# EAGLE board Kickerboard (EAGLE 9.6.2)
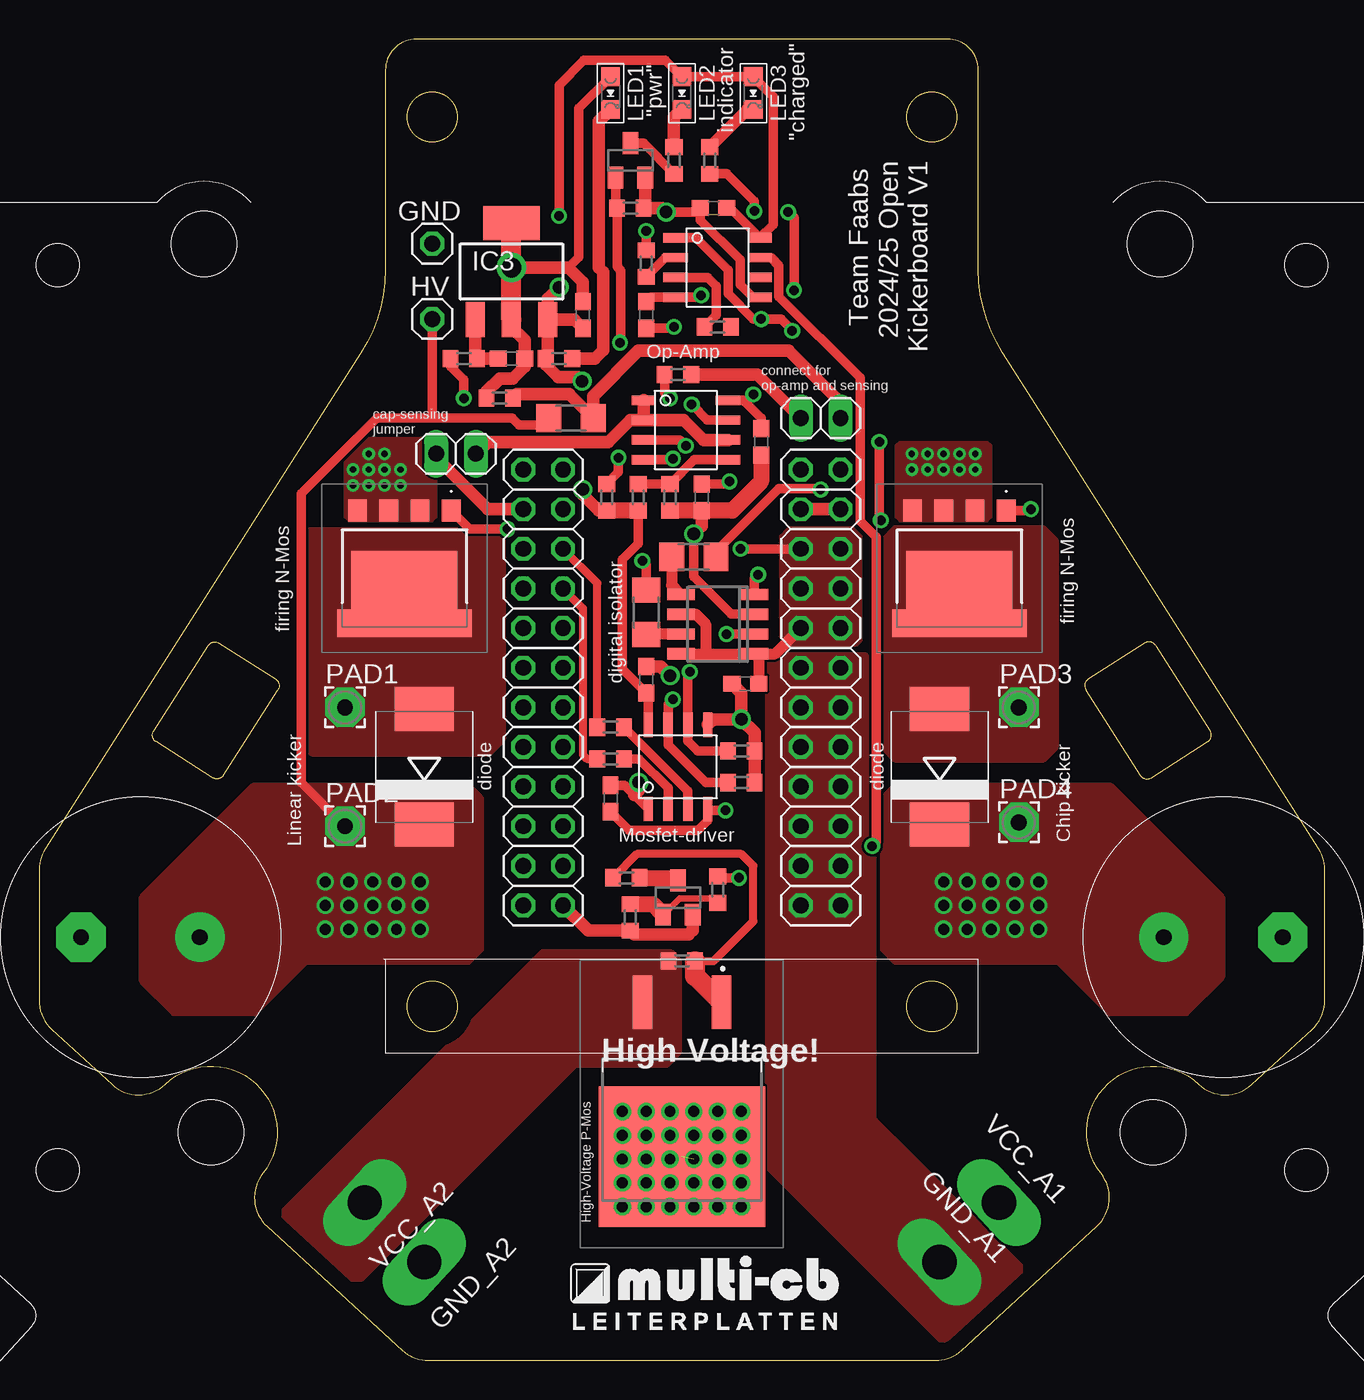
[diagram p0: board, top side]
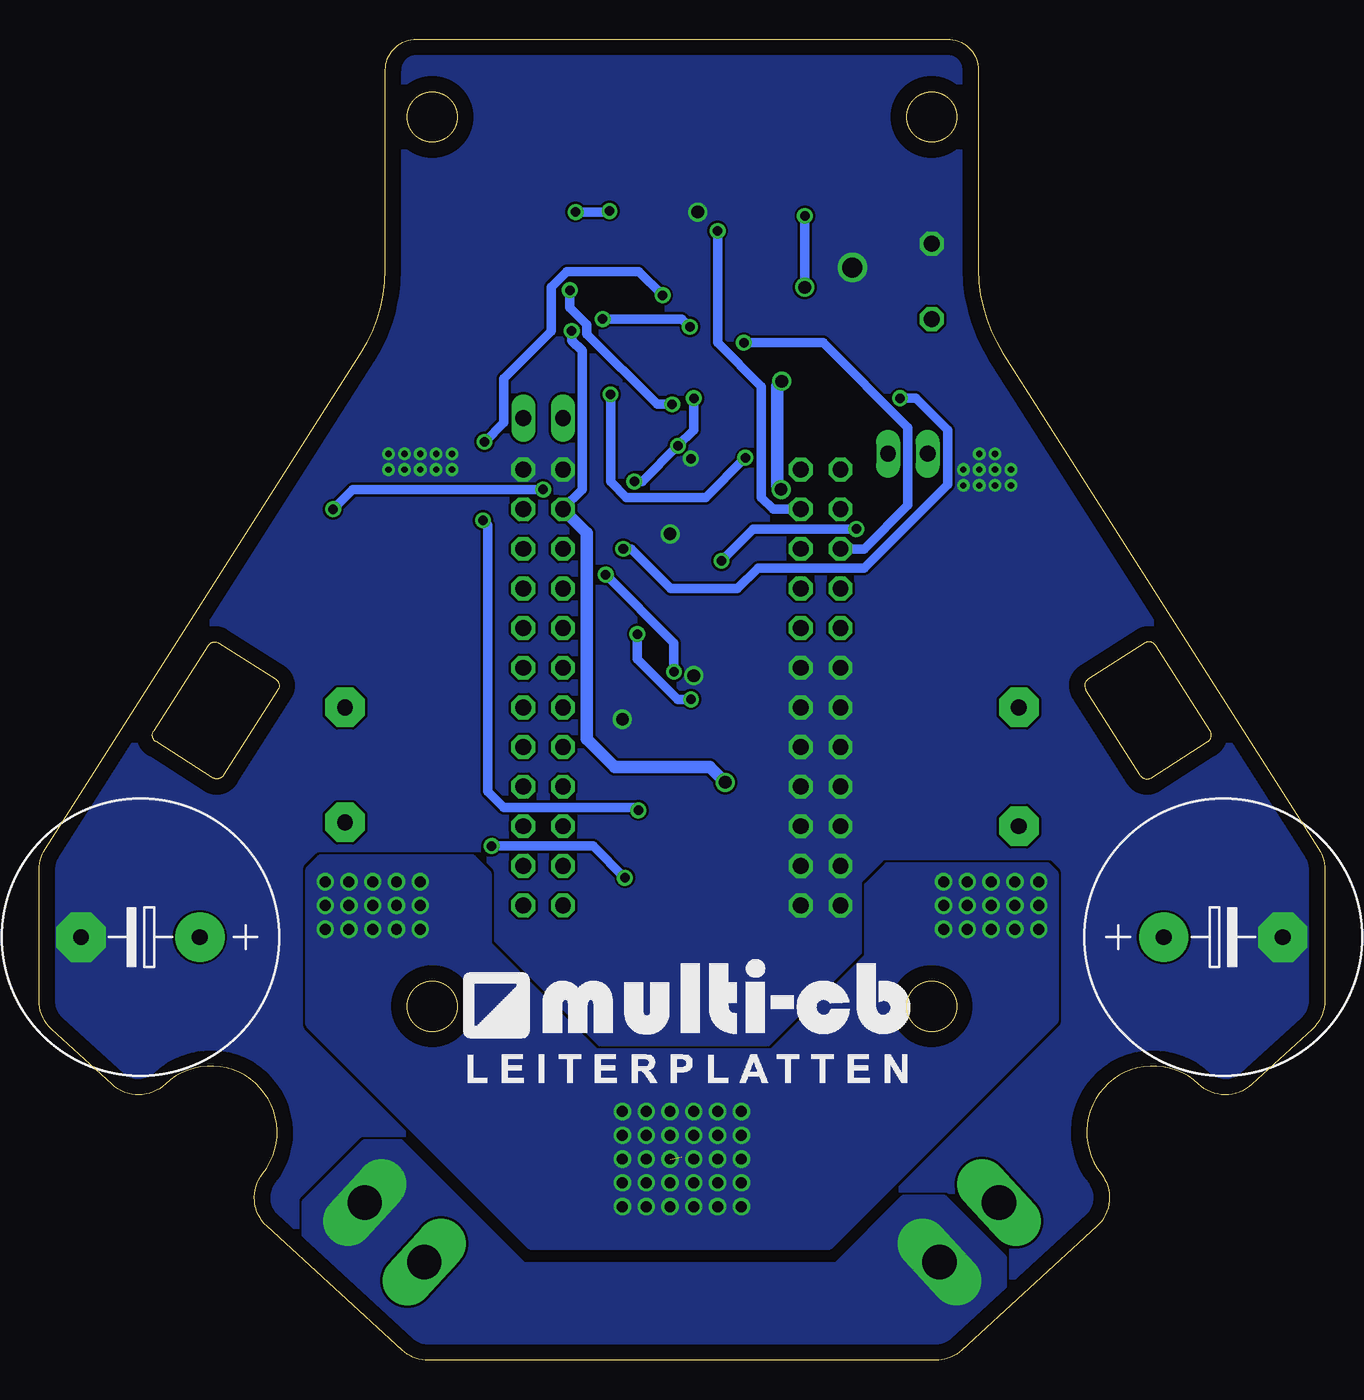
[diagram p1: board, bottom side, seen from below]

Size 82.39 x 84.7 mm. Coordinates in mm from the lower left corner, seen from the top.
Outline: 74.89,39.66 arc90 75.04,40.35
Outline: 71.55,45.84 arc90 70.86,45.99
Outline: 67.23,43.68 arc90 67.08,42.99
Outline: 70.57,37.51 arc90 71.26,37.35
Outline: 71.55,45.84 arc90 70.86,45.99
Outline: 70.86,45.99 67.23,43.68
Outline: 67.23,43.68 arc90 67.08,42.99
Outline: 67.08,42.99 70.57,37.51
Outline: 70.57,37.51 arc90 71.26,37.35
Outline: 71.26,37.35 74.89,39.66
Outline: 74.89,39.66 arc90 75.04,40.35
Outline: 71.55,45.84 75.04,40.35
Outline: 4.68,17.69 arc86 8.09,17.71 arc-172 14.34,11.98 arc86 14.61,8.59 23.27,0.66 arc42 24.96,0 57.43,0 arc42 59.12,0.66 67.77,8.59 arc86 68.05,11.98 arc-172 74.3,17.71 arc86 77.7,17.69 81.58,21.24 arc48 82.39,23.08 82.39,31.46 arc32 82,32.8 61.76,64.56 arc-32 60.19,69.94 60.19,82.7 arc90 58.19,84.7 24.19,84.7 arc90 22.19,82.7 22.19,69.94 arc-32 20.63,64.56 0.39,32.8 arc32 0,31.46 0,23.08 arc48 0.81,21.24 4.68,17.69
Outline: 10.84,45.84 arc-90 11.53,45.99 15.16,43.68 arc-90 15.31,42.99 11.82,37.51 arc-90 11.13,37.35 7.5,39.66 arc-90 7.35,40.35 10.84,45.84
Outline: circle at 57.19,79.7 radius 1.6
Outline: circle at 57.19,22.7 radius 1.6
Outline: circle at 25.19,22.7 radius 1.6
Outline: circle at 25.19,79.7 radius 1.6
Copper layers (1*16): Top 0.035mm / dielectric 1.5mm / Bottom 0.035mm
Design rules "default": minimum track width 6mil, minimum drill 0.35mm, track to track 6mil, track to pad 6mil, pad to pad 6mil, via to via 6mil, smd to smd 6mil, copper to edge 40mil, drill to drill 6mil, minimum pad ring 10mil, minimum via ring 8mil, stop-mask expansion 4mil, vias tented up to drill 0mil, thermal gap 10mil
Net classes: 1 HV: width 0.203 mm, drill 0.305 mm, clearance 0.762 mm

## Footprints (pad centres in the part's own frame; a part is rotated, then mirrored left to right if it is on the bottom)
OPEN24_RCL_E7,5-18 = drill 1.016 pad 3.15: + -3.81,0 | drill 1.016 pad 3.15 octagon: - 3.81,0
C0603 = smd 1.1 x 1: 1 -0.85,0; 2 0.85,0
2X12 = drill 1.016 octagon: 1 -13.97,-1.27; 2 -13.97,1.27; 3 -11.43,-1.27; 4 -11.43,1.27; 5 -8.89,-1.27; 6 -8.89,1.27; 7 -6.35,-1.27; 8 -6.35,1.27; 9 -3.81,-1.27; 10 -3.81,1.27; 11 -1.27,-1.27; 12 -1.27,1.27; 13 1.27,-1.27; 14 1.27,1.27; 15 3.81,-1.27; 16 3.81,1.27; 17 6.35,-1.27; 18 6.35,1.27; 19 8.89,-1.27; 20 8.89,1.27; 21 11.43,-1.27; 22 11.43,1.27; 23 13.97,-1.27; 24 13.97,1.27
OPEN24_DIODE_SMC:1 = smd 2.8 x 3.8: A 3.7,0; C -3.7,0
SQM120P10_10M1LGE3_SQM120P10_10M1LGE3 = smd 10.668 x 9.017: DRAIN 0,3.4 | smd 1.257 x 3.429: GATE -2.525,-6.506; SOURCE 2.525,-6.506
1X02 = drill 1.016 long: 1 -1.27,0; 2 1.27,0
1X01 = drill 1.016 octagon: 1 0,0
MOTOR-DRIVER_PPAD = drill 2.2 long: P$1 0,0
TIGERS_SOIC8N = smd 1.55 x 0.6: 1 -2.7,1.905; 2 -2.7,0.635; 3 -2.7,-0.635; 4 -2.7,-1.905; 5 2.7,-1.905; 6 2.7,-0.635; 7 2.7,0.635; 8 2.7,1.905
TIGERS_SOT223 = smd 1.219 x 2.235: 1 -2.311,-3.099; 2 0,-3.099; 3 2.311,-3.099 | smd 3.6 x 2.2: 4 0,3.099
R0603 = smd 1 x 1.1: 1 -0.85,0; 2 0.85,0
POWER_DISTRIBUTION_CHIPLED_0805 = smd 1.2 x 1.2: A 0,-1.05; C 0,1.05
IR_SO08 = smd 0.72 x 1.78: 1 -1.905,-2.35; 2 -0.635,-2.35; 3 0.635,-2.35; 4 1.905,-2.35; 5 1.905,2.35; 6 0.635,2.35; 7 -0.635,2.35; 8 -1.905,2.35
TIGERS_2,54/1,0 = drill 1.016 pad 2.54 octagon: 1 0,0
PSMNR55-40SSHJ_BUK7S1R540HJ = smd 1.2 x 1.4: 1 -3,-3.725; 2 -1,-3.725; 3 1,-3.725; 4 3,-3.725 | smd 8.6 x 1.76: 5 0,3.495 | smd 6.8 x 3.74: 6 0,0.745
TRANSISTOR-SMALL-SIGNAL_SOT23 = smd 1 x 1.4: 1 -0.95,-1.1; 2 0.95,-1.1; 3 0,1.1
R1206 = smd 1.6 x 1.803: 1 -1.422,0; 2 1.422,0

## Placement (x,y rotation side)
C1  63V, 2200uF  [OPEN24_RCL_E7,5-18]  6.5,27.14 0 bottom
C2  63V, 2200uF  [OPEN24_RCL_E7,5-18]  75.89,27.14 180 bottom
C3  100n  [C0603]  42.46,55.33 270 top
C4  100n  [C0603]  45.26,43.39 180 top
C5  100n  [C0603]  43.23,73.87 180 top
C6  100n  [C0603]  38.91,67.01 90 top
C9  100n  [C0603]  36.62,36.02 270 top
C10  100n  [C0603]  38.91,43.64 90 top
C22  100n  [C0603]  46.27,58.88 270 top
C24  10u  [C0603]  30.27,64.22 0 top
C25  10u  [C0603]  34.84,67.01 90 top
CONNECTOR_MAINPCB1  [2X12]  50.08,43.13 90 top
CONNECTOR_MAINPCB2  [2X12]  32.3,43.13 90 top
D1  S10MCH  [OPEN24_DIODE_SMC:1]  24.68,38.05 90 top
D2  S10MCH  [OPEN24_DIODE_SMC:1]  57.7,38.05 90 top
EN_HV-PMOS  SQM120P10  [SQM120P10_10M1LGE3_SQM120P10_10M1LGE3]  41.19,16.46 180 top
EN_HVSENS  [1X02]  50.08,60.41 180 top
GND  [1X01]  25.19,71.58 0 top
GND_A1  MOTOR-DRIVER_PPAD  [MOTOR-DRIVER_PPAD]  57.7,6.3 42.5 top
GND_A2  MOTOR-DRIVER_PPAD  [MOTOR-DRIVER_PPAD]  24.68,6.3 317.5 top
HV  [1X01]  25.19,66.76 0 top
HV_SENSED_JP  [1X02]  26.72,58.12 180 top
IC1  [TIGERS_SOIC8N]  43.48,70.06 0 top
IC2  [TIGERS_SOIC8N]  40.94,38.05 90 top
IC3  TIGERS_MCP1790  [TIGERS_SOT223]  30.27,69.8 0 top
IC4  MCP6002  [TIGERS_SOIC8N]  41.45,59.64 0 top
L1  120R, Ferride Bead!!!  [R0603]  27.22,64.22 180 top
L2  120R, Ferride Bead!!!  [R0603]  36.37,55.33 270 top
LED1  [POWER_DISTRIBUTION_CHIPLED_0805]  36.62,81.23 180 top
LED2  [POWER_DISTRIBUTION_CHIPLED_0805]  41.19,81.23 180 top
LED3  [POWER_DISTRIBUTION_CHIPLED_0805]  45.77,81.23 180 top
MOSFET-DRIVER  UCC27624QDRQ1  [IR_SO08]  43.48,47.2 90 top
PAD1  LINEAR  [TIGERS_2,54/1,0]  19.6,41.86 0 top
PAD2  LINEAR  [TIGERS_2,54/1,0]  19.6,34.24 0 top
PAD3  CHIP  [TIGERS_2,54/1,0]  62.78,41.86 0 top
PAD4  CHIP  [TIGERS_2,54/1,0]  62.78,34.5 0 top
Q1  PSMN3R3  [PSMNR55-40SSHJ_BUK7S1R540HJ]  23.41,50.75 180 top
Q2  PSMN3R3  [PSMNR55-40SSHJ_BUK7S1R540HJ]  58.97,50.75 180 top
Q3  MMFTN123  [TRANSISTOR-SMALL-SIGNAL_SOT23]  40.94,29.67 0 top
Q5  bss138  [TRANSISTOR-SMALL-SIGNAL_SOT23]  37.89,76.92 0 top
R1  10R  [R1206]  38.91,47.96 90 top
R2  10R  [R1206]  41.96,51.52 0 top
R3  1k  [R0603]  45,39.07 180 top
R4  1k  [R0603]  45,37.04 180 top
R5  1k  [R0603]  33.32,64.22 180 top
R6  100R  [R0603]  36.62,38.56 180 top
R7  100R  [R0603]  36.62,40.59 180 top
R8  50k  [R0603]  37.64,30.94 180 top
R9  10k  [R0603]  41.19,25.61 180 top
R10  10k  [R0603]  37.89,28.4 90 top
R11  100R  [R0603]  43.48,30.18 270 top
R12  1k  [R0603]  40.69,76.92 90 top
R13  5k  [R0603]  37.89,73.87 0 top
R14  1k  [R0603]  42.97,76.92 90 top
R15  100R  [R0603]  38.91,70.31 90 top
R16  1k  [R0603]  40.94,63.2 0 top
R17  100k  [R0603]  38.4,55.33 90 top
R18  100k  [R0603]  40.43,55.33 270 top
R19  10M 0.5%  [R1206]  34.08,60.41 180 top
R20  549k  [R0603]  29.51,61.68 0 top
R21  100R  [R0603]  43.48,66.25 0 top
U$1  MULTICB_LOGOSTANDART  [SMALL_STANDARTLOGO_28MM]  56.43,16.97 0 bottom
U$2  MULTICB_LOGOMINI  [MINI_LOGO_17MM]  33.32,1.48 0 top
VCC_A1  MOTOR-DRIVER_PPAD  [MOTOR-DRIVER_PPAD]  61.51,10.11 42.5 top
VCC_A2  MOTOR-DRIVER_PPAD  [MOTOR-DRIVER_PPAD]  20.87,10.11 317.5 top

## Library data of the parts
C1 C2 = Schussboard; SPICEPREFIX: C
C3-C6 C9 C10 C22 C24 C25 = rcl; SPICEPREFIX: C
CONNECTOR_MAINPCB1 CONNECTOR_MAINPCB2 EN_HVSENS GND HV HV_SENSED_JP = pinhead
D1 D2 IC1-IC3 = Schussboard
EN_HV-PMOS = Schussboard; DESCRIPTION: Trans MOSFET P-CH 100V 120A Automotive 3-Pin(2+Tab) D2PAK; HEIGHT: 0.19mm; MANUFACTURER_NAME: Vishay; MANUFACTURER_PART_NUMBER: SQM120P10_10M1LGE3; MOUSER_PART_NUMBER: 78-SQM120P1010M1LGE3; MOUSER_PRICE-STOCK: https://www.mouser.co.uk/ProductDetail/Vishay-Semiconductors/SQM120P10_10M1LGE3?qs=G1ssh2j%252Bqz5tiHgZruj39A%3D%3D
GND_A1 GND_A2 VCC_A1 VCC_A2 = small_bat_pad
IC4 PAD1-PAD4 = Kicking Device v13b
L1 L2 R1-R18 R21 = rcl; SPICEPREFIX: R
LED1-LED3 = Open24; MF: Würth Elektronik; MPN: 150080GS75000
MOSFET-DRIVER = Schussboard; MF: INTERNATIONAL RECTIFIER(IR); MPN: IR4426S; OC_FARNELL: 1023266; OC_NEWARK: 27C6913
Q1 Q2 = Schussboard; DESCRIPTION: MOSFET PSMNR55-40SSH/SOT1235/LFPAK88; HEIGHT: 1.85mm; MANUFACTURER_NAME: Nexperia; MANUFACTURER_PART_NUMBER: PSMNR55-40SSHJ; MOUSER_PART_NUMBER: 771-PSMNR55-40SSHJ; MOUSER_PRICE-STOCK: https://www.mouser.co.uk/ProductDetail/Nexperia/PSMNR55-40SSHJ?qs=ljCeji4nMDllQgSPPJscmQ%3D%3D
Q3 Q5 = Open24
R19 = rcl; SPICEPREFIX: R; VMAX: 1500V
R20 = rcl; SPICEPREFIX: R; TOL: 0.1%
U$1 U$2 = MultiCB_logos

## Nets
+3V3: C5.1 C10.1 C25.1 IC1.8 IC2.8 IC3.3 L2.2 LED2.A LED3.A R5.2 R17.1
+12V: C4.1 CONNECTOR_MAINPCB1.15 CONNECTOR_MAINPCB1.16 CONNECTOR_MAINPCB1.17 CONNECTOR_MAINPCB1.18 CONNECTOR_MAINPCB1.19 CONNECTOR_MAINPCB1.20 L1.2 MOSFET-DRIVER.1 MOSFET-DRIVER.6 MOSFET-DRIVER.8
CAP: HV_SENSED_JP.1 IC4.1 IC4.2 IC4.6
CAP-RAW: EN_HVSENS.1 R19.1 R20.2
CAP_RAW: EN_HVSENS.2 R16.2
CHG_LED: IC4.7 R14.1
CHIP: CONNECTOR_MAINPCB2.19 R7.2
EN_HV: IC1.7 R11.1
EN_HV_T: CONNECTOR_MAINPCB2.21 R15.2
GATE_S1: Q1.1 R1.2
GATE_S2: Q2.1 R2.2
GND: C1.- C2.- C3.2 C4.2 C5.2 C10.2 C22.2 C24.2 C25.2 CONNECTOR_MAINPCB1.23 CONNECTOR_MAINPCB1.24 CONNECTOR_MAINPCB2.1 CONNECTOR_MAINPCB2.2 CONNECTOR_MAINPCB2.3 CONNECTOR_MAINPCB2.4 CONNECTOR_MAINPCB2.5 CONNECTOR_MAINPCB2.6 CONNECTOR_MAINPCB2.7 CONNECTOR_MAINPCB2.8 CONNECTOR_MAINPCB2.9 CONNECTOR_MAINPCB2.10 CONNECTOR_MAINPCB2.11 CONNECTOR_MAINPCB2.12 CONNECTOR_MAINPCB2.13 CONNECTOR_MAINPCB2.14 GND.1 IC1.5 IC2.5 IC3.2 IC3.4 IC4.4 LED1.A MOSFET-DRIVER.3 Q1.2 Q1.3 Q1.4 Q2.2 Q2.3 Q2.4 Q3.2 Q5.2 R3.1 R4.1 R10.1 R13.2 R18.2 R20.1
LED1: CONNECTOR_MAINPCB2.20 Q5.1 R13.1
LINEAR: CONNECTOR_MAINPCB2.17 R6.2
MAIN-3V3: C6.1 C9.1 CONNECTOR_MAINPCB1.21 CONNECTOR_MAINPCB1.22 IC1.1 IC2.1
N$1: MOSFET-DRIVER.5 R2.1
N$2: MOSFET-DRIVER.7 R1.1
N$3: D2.A PAD3.1 Q2.5 Q2.6
N$4: IC2.2 R6.1
N$5: IC2.3 R7.1
N$6: EN_HV-PMOS.GATE R8.2 R9.1
N$7: Q3.3 R8.1
N$8: C24.1 IC3.1 L1.1
N$9: IC1.2 R15.1
N$10: D1.A PAD1.1 Q1.5 Q1.6
N$11: Q3.1 R10.2 R11.2
N$12: IC1.3 R21.1
N$13: LED2.C R12.2
N$14: Q5.3 R12.1
N$15: LED1.C R5.1
N$16: CONNECTOR_MAINPCB2.22 HV_SENSED_JP.2
N$17: LED3.C R14.2
N$18: C6.2 C9.2 IC1.4 IC2.4
N$19: R21.2
N$20: C3.1 IC4.3 R16.1
N$21: IC4.5 R17.2 R18.1
N$22: IC1.6
N$25: GND_A2.P$1 VCC_A1.P$1
N$196: C22.1 IC4.8 L2.1
SCHUSS1-: IC2.7 MOSFET-DRIVER.2 R4.2
SCHUSS2-: IC2.6 MOSFET-DRIVER.4 R3.2
VCC: CONNECTOR_MAINPCB1.1 CONNECTOR_MAINPCB1.2 CONNECTOR_MAINPCB1.3 CONNECTOR_MAINPCB1.4 CONNECTOR_MAINPCB1.5 CONNECTOR_MAINPCB1.6 CONNECTOR_MAINPCB1.7 CONNECTOR_MAINPCB1.8 CONNECTOR_MAINPCB1.9 CONNECTOR_MAINPCB1.10 CONNECTOR_MAINPCB1.11 CONNECTOR_MAINPCB1.12 CONNECTOR_MAINPCB1.13 CONNECTOR_MAINPCB1.14 GND_A1.P$1
VCC_HV: C1.+ C2.+ D1.C D2.C EN_HV-PMOS.DRAIN HV.1 PAD2.1 PAD4.1 R19.2
VCC_HV_BAT: EN_HV-PMOS.SOURCE R9.2 VCC_A2.P$1

## Tracks (layer width: path | path; a pad name or v marks a point on that pad's centre or on a via)
+3V3  (via drill 0.61, 0.81)
  Top 0.61: R17.1 38.4,52.37 37.37,51.34 37.37,44.33 C10.1 39.03,42.67 IC2.8 | v33.32,73.36 33.32,81.74 34.92,83.34 40.14,83.34 LED2.A LED3.A 47.04,81.01 47.04,72.82 IC1.8 44.27,73.87 C5.1
  Top 0.813: IC3.3 32.58,64.33 R5.2 32.47,63.82 33.27,63.02 34.54,63.02 v34.79,62.77 | C25.1 34.3,66.71 IC3.3 | IC3.3 32.58,68.05 v33.32,68.79 | v34.84,55.83 34.84,55.49 35.86,54.48 L2.2
  Top 1.016: R17.1 L2.2
  Bottom 0.61: v33.32,73.36 v33.32,68.79
  Bottom 0.813: v34.79,62.77 35.1,62.46 35.1,56.09 v34.84,55.83
+12V  (via drill 0.61)
  Top 0.61: L1.2 26.37,63.71 27.22,62.86 v27.22,61.68 | v44.95,52.02 CONNECTOR_MAINPCB1.20
  Top 0.711: MOSFET-DRIVER.8 42.72,45.29 | 42.72,45.29 MOSFET-DRIVER.1 | MOSFET-DRIVER.1 46.11,45.02 C4.1 | MOSFET-DRIVER.6 42.08,47.83 42.72,47.2 42.72,45.29 | MOSFET-DRIVER.1 47.16,45.29 CONNECTOR_MAINPCB1.16
  Bottom 0.61: v27.22,61.68 26.21,61.68 24.18,59.64 24.18,56.14 29.51,50.81 36.32,50.81 37.64,49.48 41.9,49.48 44.44,52.02 v44.95,52.02
  pour Top (no thermals): 47.54,52.79 47.54,46.44 48.05,45.93 52.37,45.93 52.62,46.18 52.62,52.79 52.12,53.29 48.05,53.29
CAP
  Top 0.813: IC4.2 IC4.1 | IC4.2 37.87,60.28 36.47,58.88 28.75,58.88 HV_SENSED_JP.1 | IC4.2 41.32,60.28 42.59,59.01 IC4.6
CAP-RAW
  Top 0.813: R20.2 30.61,61.93 33.98,61.93 R19.1 35.5,61.83 38.4,64.72 48.05,64.72 51.35,61.42 EN_HVSENS.1
CAP_RAW
  Top 0.813: EN_HVSENS.2 46.02,63.2 R16.2
CHG_LED  (via drill 0.61)
  Top 0.61: IC4.7 42.83,60.28 v41.82,61.29 | v45.83,73.68 45.83,74.31 44.08,76.07 R14.1 | v48.38,68.6 48.38,73.24 v48,73.61
  Bottom 0.61: v41.82,61.29 42.79,61.29 47.29,65.79 47.29,66.39 48.38,67.48 v48.38,68.6 | v48,73.61 45.89,73.61 v45.83,73.68
CHIP
  Top 0.508: R7.2 35.77,49.83 CONNECTOR_MAINPCB2.19
EN_HV  (via drill 0.61)
  Top 0.61: IC1.7 46.91,70.69 47.41,70.19 47.41,68.2 52.62,62.99 52.62,53.8 53.64,52.79 53.64,33.23 v53.39,32.97 | v44.85,30.94 43.57,30.94 R11.1
  Bottom 0.61: v53.39,32.97 46.88,32.97 v44.85,30.94
EN_HV_T  (via drill 0.61)
  Top 0.61: v38.91,72.4 R15.2
  Bottom 0.61: CONNECTOR_MAINPCB2.21 35.35,54.56 36.11,55.33 36.11,62.44 38.91,65.23 v38.91,72.4
GATE_S1  (via drill 0.61)
  Top 0.61: v38.65,51.26 38.91,51.01 R1.2 | v30.02,53.29 27.6,53.29 Q1.1
  Bottom 0.61: v38.65,51.26 36.62,53.29 v30.02,53.29
GATE_S2  (via drill 0.61)
  Top 0.61: R2.2 43.38,51.87 47.39,55.89 50.03,55.89 v50.08,55.83 | v63.55,54.56 63.46,54.48 Q2.1
  Bottom 0.61: v50.08,55.83 62.28,55.83 v63.55,54.56
GND  (via drill 0.4, 0.61, 0.81, 1.27)
  Top 0.61: MOSFET-DRIVER.3 44.37,47.83 41.96,50.25 v41.96,52.98 | v40.62,57.8 40.56,57.74 IC4.4 | LED1.A 34.59,80.25 34.59,70.73 33.92,70.06 | IC1.5 45.73,68.15 44.92,68.97 44.92,70.57 42.38,73.11 C5.2 42.12,73.61 v40.18,73.61
  Top 0.813: v41.96,52.98 42.46,53.49 C3.2 | R4.1 R3.1 45.85,40.25 v45,41.1 | IC2.5 43.19,41.1 v45,41.1 | C4.2 45,42.8 45,42.66 45,42.65 v45,41.1 | Q3.2 41.89,27.57 41.63,27.31 38.13,27.31 R10.1 35.19,27.55 CONNECTOR_MAINPCB2.1 | C25.2 34.84,69.13 33.92,70.06 v30.27,70.06 | Q5.2 38.84,73.97 R13.2 39.92,73.87 v40.18,73.61 | IC3.2 30.27,66.25 31.12,65.4 C24.2 31.12,63.71 30.36,62.95 29.51,62.95 28.66,62.1 R20.1 | C10.2 39.84,44.49 v40.43,43.9
  Top 1.016: R18.2 C3.2 44.41,54.48 46.27,56.34 C22.2
  Top 1.27: IC3.2 v30.27,70.06 IC3.4
  other vias: 57.96,57.1 56.94,57.1 55.93,57.1 55.93,58.12 56.94,58.12 57.96,58.12 58.97,58.12 59.99,58.12 59.99,57.1 58.97,57.1 21.13,56.09 20.11,56.09 22.14,58.12 21.13,58.12 20.11,57.1 21.13,57.1 22.14,57.1 23.16,57.1 23.16,56.09 22.14,56.09
  pour Bottom (rank 2, no thermals): -6.81,80.47 -6.56,80.22 -6.56,5.54 2.59,-3.6 85.39,-3.6 95.3,6.3 95.3,85.3 87.93,92.66 0.3,92.66 -6.81,85.55
  pour Top (no thermals): 55.16,53.8 60.75,53.8 61.01,54.06 61.01,58.63 60.75,58.88 55.16,58.88 54.91,58.63 54.91,54.06
  pour Top (no thermals): 19.86,53.8 25.19,53.8 25.45,54.06 25.45,58.37 24.68,59.14 19.86,59.14 19.6,58.88 19.6,54.06
LED1  (via drill 0.61)
  Top 0.61: v37.22,65.23 37.27,65.28 37.27,69.87 37.04,70.1 R13.1 36.94,73.97 Q5.1
  Bottom 0.61: v37.22,65.23 32.14,65.23 26.72,59.8 26.72,54.82 29.51,52.02 CONNECTOR_MAINPCB2.20
LINEAR
  Top 0.508: CONNECTOR_MAINPCB2.17 34.84,48.21 34.84,38.82 35.1,38.56 R6.2
MAIN-3V3  (via drill 0.61, 0.81)
  Top 0.61: IC2.1 38.13,36.26 37.52,36.87 C9.1 | v48.25,65.99 48.25,66.05 47.54,66.76 v46.27,66.76 45.77,66.76 44.15,68.37 44.15,69.89 42.08,71.96 IC1.1 | v40.69,66.25 40.6,66.16 C6.1
  Top 0.813: 38.13,36.26 38.42,36.55 v38.42,37.06 | CONNECTOR_MAINPCB1.22 CONNECTOR_MAINPCB1.21
  Bottom 0.61: CONNECTOR_MAINPCB1.22 48.81,54.62 47.59,55.84 47.59,64.72 48.25,65.38 v48.25,65.99 | v46.27,66.76 41.19,66.76 v40.69,66.25
  Bottom 0.813: v38.42,37.06 39.42,38.05 45.51,38.05 47.29,39.83 47.29,53.04 CONNECTOR_MAINPCB1.22
N$1
  Top 0.711: MOSFET-DRIVER.5 40.53,49.7 R2.1
N$2
  Top 0.711: MOSFET-DRIVER.7 38.93,46.56 R1.1
N$3
  pour Top (no thermals): 54.15,39.32 54.15,52.53 54.91,53.29 64.31,53.29 65.07,52.53 65.07,39.32 64.31,38.56 54.91,38.56
N$4
  Top 0.61: R6.1 38.43,38.56 40.3,36.68 IC2.2
N$5
  Top 0.61: R7.1 41.57,36.49 IC2.3
N$6
  Top 0.508: R8.2 38.31,32.47 45,32.47 45.77,31.7 45.77,28.15 43.23,25.61 R9.1
  Top 1.27: EN_HV-PMOS.GATE 42.04,24.65 R9.1
N$7
  Top 1.016: R8.1 40.77,30.94 Q3.3
N$8
  Top 0.813: IC3.1 27.96,64.33 L1.1 C24.1
N$9
  Top 0.61: IC1.2 40.14,70.69 R15.1
N$10
  pour Top (no thermals): 16.81,39.83 16.81,52.53 17.32,53.04 29.26,53.04 29.51,52.79 29.51,39.83 28.75,39.07 17.57,39.07
N$11
  Top 0.406: R11.2 43.18,29.63 41.05,29.63 Q3.1
  Top 1.016: R10.2 39.31,29.25 Q3.1
N$12
  Top 0.61: IC1.3 42.84,69.42 43.39,68.88 43.39,67.01 R21.1
N$13
  Top 0.813: LED2.C 40.69,79.68 R12.2
N$14
  Top 0.61: Q5.3 38.74,78.02 R12.1
N$15
  Top 0.813: LED1.C 35.86,79.42 35.86,70.06 36.16,69.76 36.16,64.77 35.61,64.22 R5.1
N$16
  Top 0.813: CONNECTOR_MAINPCB2.22 28.75,54.56 25.45,57.87 HV_SENSED_JP.2
N$17
  Top 0.813: R14.2 45.39,80.18 LED3.C
N$18  (via drill 0.61)
  Top 0.61: C9.2 37.8,33.99 42.21,33.99 42.84,34.63 IC2.4 42.94,35.26 v43.99,35.26 | C6.2 39.2,68.15 IC1.4 42.3,68.15 v42.43,68.28 | v53.84,58.88 53.84,53.95 v53.94,53.85
  Bottom 0.61: v42.43,68.28 43.95,69.8 48.56,69.8 49.58,68.79 49.58,65.99 52.62,62.95 52.62,60.1 v53.84,58.88 | v53.94,53.85 53.64,53.55 53.64,36.48 52.62,35.46 44.24,35.46 44.04,35.26 v43.99,35.26
N$20  (via drill 0.61)
  Top 0.61: C3.1 44.08,56.18 v44.24,56.34 | v41.45,58.63 41.07,59.01 IC4.3 | R16.1 40.09,62.02 v40.43,61.68
  Bottom 0.61: v44.24,56.34 43.73,56.34 v41.45,58.63 40.43,59.64 v40.43,61.68
N$21
  Top 0.61: IC4.5 41.99,57.74 R18.1 R17.2
N$25
  pour Bottom (no thermals): 26.97,10.37 31.29,6.05 51.35,6.05 59.23,13.92 61.51,13.92 65.32,10.11 65.32,7.83 58.21,0.72 23.92,0.72 20.62,4.02 20.62,6.56 24.43,10.37
N$196  (via drill 0.61)
  Top 0.61: IC4.8 45.13,61.55 45.26,61.42 | C22.1 46.27,60.41 45.26,61.42 | L2.1 37.13,56.94 v37.13,57.87 | v45.77,61.93 45.26,61.42
  Bottom 0.61: v37.13,57.87 39.67,55.33 44.75,55.33 45.77,56.34 v45.77,61.93
SCHUSS1-  (via drill 0.61)
  Top 0.61: R4.2 42.72,37.04 40.3,39.45 IC2.7 40.3,42.07 v40.61,42.37 | v44.05,46.56 MOSFET-DRIVER.2
  Bottom 0.61: v40.61,42.37 41.45,42.37 44.05,44.98 v44.05,46.56
SCHUSS2-  (via drill 0.61)
  Top 0.61: R3.2 42.21,39.07 41.57,39.71 IC2.6 41.57,44.02 v41.7,44.15 | v46.08,50.37 45.83,50.12 MOSFET-DRIVER.4
  Bottom 0.61: v41.7,44.15 41.7,45.99 v46.08,50.37
VCC
  pour Top (no thermals): 46.78,45.17 52.88,45.17 53.39,44.66 53.39,15.45 62.78,6.05 62.78,5.29 58.72,1.22 57.96,1.22 46.78,12.4
VCC_HV  (via drill 0.7)  (1 unrouted)
  Top 0.61: PAD2.1 16.81,37.04 16.81,55.58 21.64,60.41 25.19,60.41 | 25.19,60.41 30.32,60.41 30.78,59.95 32.2,59.95 R19.2 | HV.1 25.19,60.41
  other vias: 18.33,29.16 19.86,29.16 21.38,29.16 22.91,29.16 24.43,29.16 24.43,27.64 22.91,27.64 21.38,27.64 19.86,27.64 18.33,27.64 18.33,30.69 19.86,30.69 21.38,30.69 22.91,30.69 24.43,30.69 38.91,9.86 38.91,11.38 38.91,12.91 38.91,14.43 38.91,15.96 40.43,15.96 40.43,14.43 40.43,12.91 40.43,11.38 40.43,9.86 37.38,9.86 37.38,11.38 37.38,12.91 37.38,14.43 37.38,15.96 57.96,29.16 59.48,29.16 61.01,29.16 62.53,29.16 64.05,29.16 64.05,27.64 62.53,27.64 61.01,27.64 59.48,27.64 57.96,27.64 57.96,30.69 59.48,30.69 61.01,30.69 62.53,30.69 64.05,30.69 43.48,9.86 43.48,11.38 43.48,12.91 43.48,14.43 43.48,15.96 45,15.96 45,14.43 45,12.91 45,11.38 45,9.86 41.96,9.86 41.96,11.38 41.96,12.91 41.96,14.43 41.96,15.96
  pour Top (no thermals): 6.65,24.34 6.65,29.67 13.76,36.78 27.48,36.78 28.24,36.02 28.24,26.37 27.48,25.61 17.06,25.61 13.76,22.31 8.68,22.31
  pour Bottom (no thermals): 17.32,31.2 17.32,21.8 31.8,7.32 50.85,7.32 65.07,21.54 65.07,31.45 64.31,32.21 54.66,32.21 53.64,31.2 53.64,26.62 46.78,19.77 35.35,19.77 29.26,25.86 29.26,30.43 27.99,31.7 17.83,31.7
  pour Top (no thermals): 54.91,36.78 68.63,36.78 75.74,29.67 75.74,24.59 73.45,22.31 68.63,22.31 65.32,25.61 54.91,25.61 54.15,26.37 54.15,36.02
VCC_HV_BAT
  pour Top (no thermals): 40.94,25.61 40.94,19.77 40.18,19 34.34,19 20.62,5.29 19.35,5.29 15.79,8.84 15.79,9.61 32.3,26.12 40.43,26.12

## Text on the board
tPlace: High Voltage!
tNames: "pwr" | indicator | "charged" | Team Faabs / 2024/25 Open / Kickerboard V1 | Op-Amp | connect for / op-amp and sensing | cap-sensing / jumper | firing N-Mos | firing N-Mos | digital isolator | diode | diode | Mosfet-driver | Chip kicker | Linear kicker | High-Voltage P-Mos